# EAGLE board SONAR-6UP-PA1 (EAGLE 9.4.2)
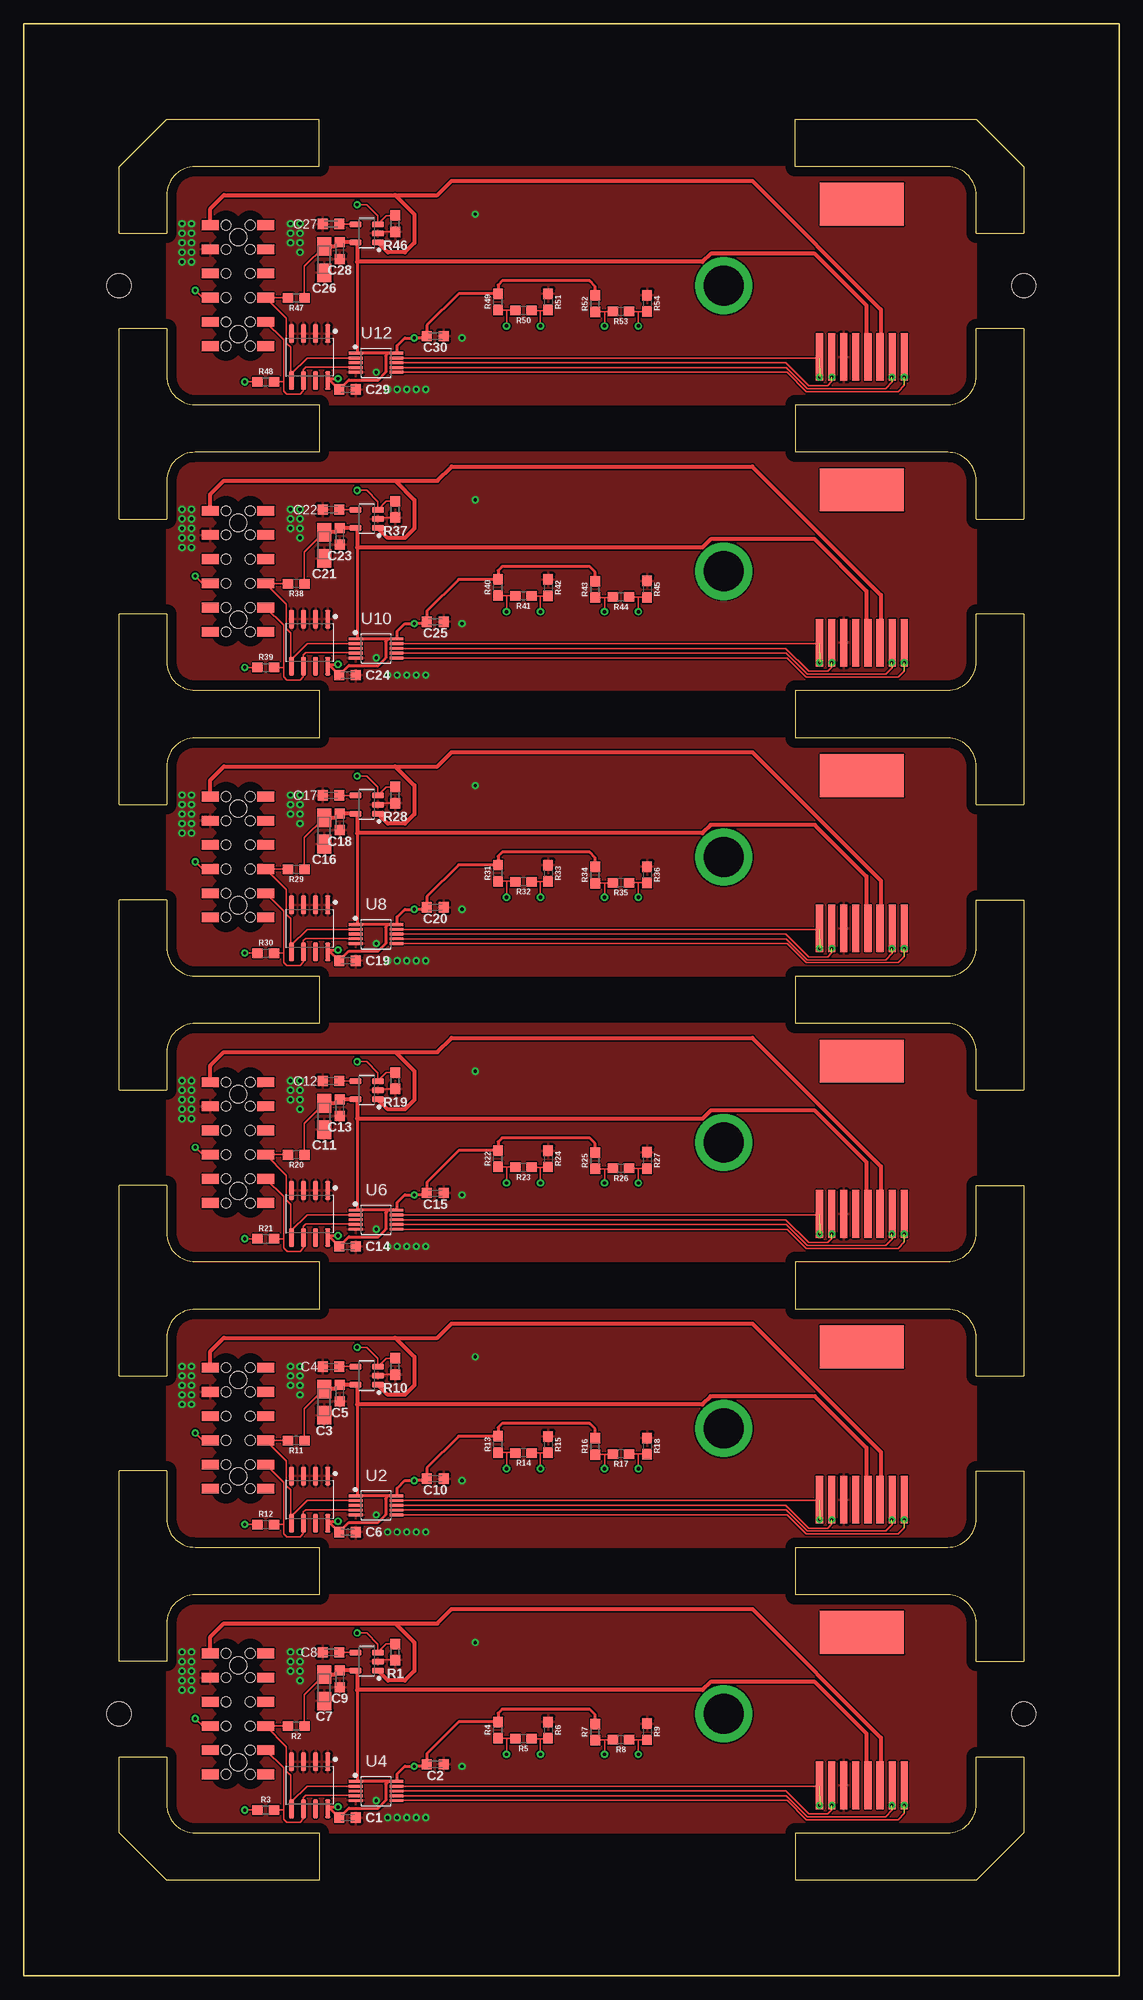
[diagram p0: board, top side]
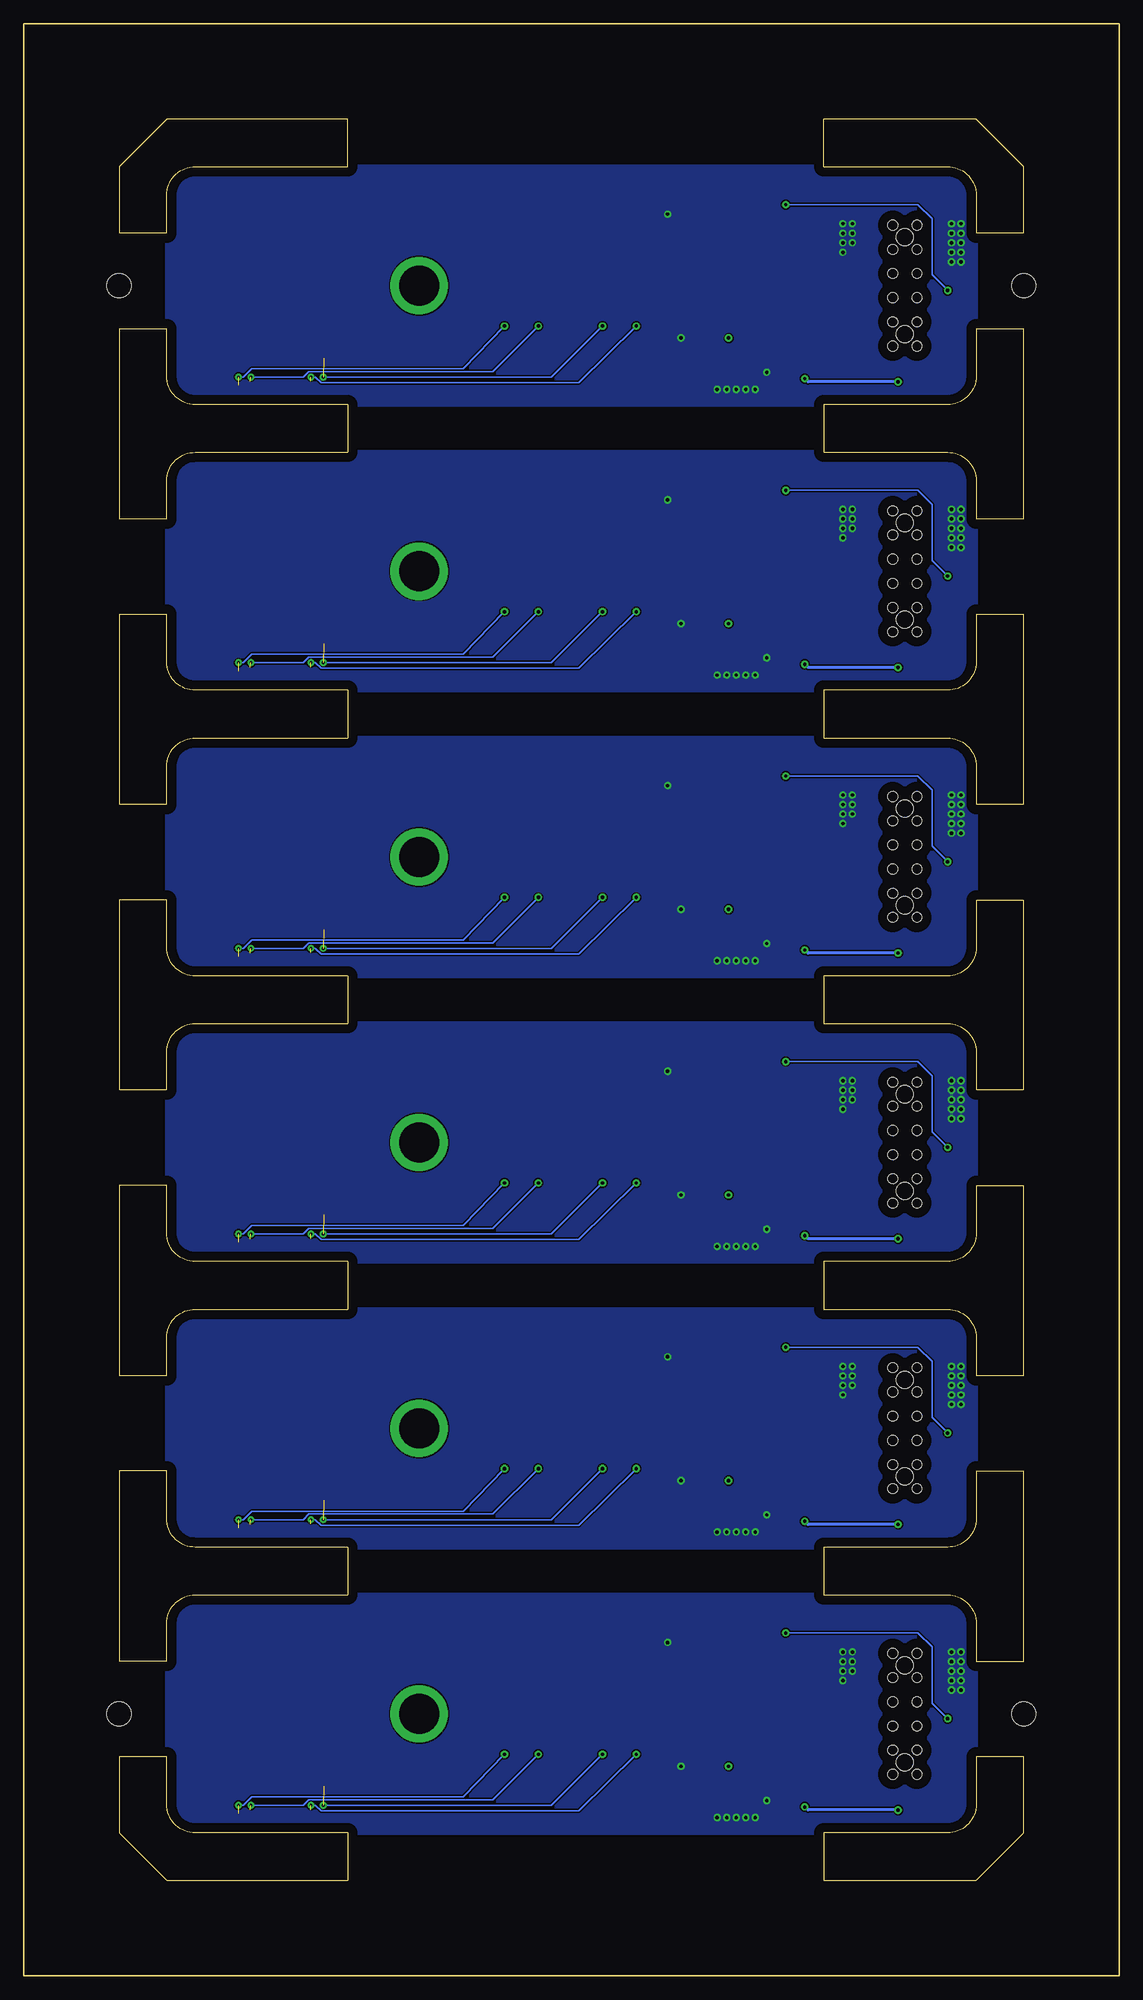
[diagram p1: board, bottom side, seen from below]

Size 115 x 205 mm. Coordinates in mm from the lower left corner, seen from the top.
Outline: 81,10 100,10 105,15 105,23 100,23 100,18 arc-90 97,15 81,15 81,10
Outline: 81,10 81,10
Outline: 15,18 arc90 18,15 31,15 31,10 15,10 10,15 10,23 15,23 15,18
Outline: 100,37 arc90 97,40 81,40 81,45 97,45 arc90 100,48 100,53 105,53 105,33 100,33 100,37
Outline: 18,40 arc90 15,37 15,33 10,33 10,53 15,53 15,48 arc90 18,45 31,45 31,40 18,40
Outline: 100,67 arc90 97,70 81,70 81,75 97,75 arc90 100,78 100,83 105,83 105,63 100,63 100,67
Outline: 18,70 arc90 15,67 15,63 10,63 10,83 15,83 15,78 arc90 18,75 31,75 31,70 18,70
Outline: 100,97 arc90 97,100 81,100 81,105 97,105 arc90 100,108 100,113 105,113 105,93 100,93 100,97
Outline: 18,100 arc90 15,97 15,93 10,93 10,113 15,113 15,108 arc90 18,105 31,105 31,100 18,100
Outline: 100,127 arc90 97,130 81,130 81,135 97,135 arc90 100,138 100,143 105,143 105,123 100,123 100,127
Outline: 18,130 arc90 15,127 15,123 10,123 10,143 15,143 15,138 arc90 18,135 31,135 31,130 18,130
Outline: 100,157 arc90 97,160 81,160 81,165 97,165 arc90 100,168 100,173 105,173 105,153 100,153 100,157
Outline: 18,160 arc90 15,157 15,153 10,153 10,173 15,173 15,168 arc90 18,165 31,165 31,160 18,160
Outline: 100,187 arc90 97,190 81,190 81,195 100,195 105,190 105,183 100,183 100,187
Outline: 18,190 arc90 15,187 15,183 10,183 10,190 15,195 31,195 31,190 18,190
Outline: 0,0 115,0 115,205 0,205 0,0
Copper layers (1*16): Top 0.035mm / dielectric 1.5mm / Bottom 0.035mm
Design rules "default *": minimum track width 6mil, minimum drill 0.35mm, track to track 6mil, track to pad 6mil, pad to pad 6mil, via to via 6mil, smd to smd 6mil, copper to edge 40mil, drill to drill 6mil, minimum pad ring 10mil, minimum via ring 8mil, stop-mask expansion 4mil, vias tented up to drill 0.35mm, thermal gap 10mil
Holes 2.54 mm at 10,177.5 105,177.5 10,27.5 105,27.5

## Footprints (pad centres in the part's own frame; a part is rotated, then mirrored left to right if it is on the bottom)
C0603K = smd 1.05 x 1.08: 1 -0.875,0; 2 0.875,0
A/3216-18R = smd 1.95 x 1.5: + 1.375,0; - -1.375,0
M20-7810645 = smd 1.02 x 1.78: P$1 -6.35,-2.91; P$2 -3.81,-2.91; P$3 -1.27,-2.91; P$4 1.27,-2.91; P$5 3.81,-2.91; P$6 6.35,-2.91; P$7 6.35,2.91; P$8 3.81,2.91; P$9 1.27,2.91; P$10 -1.27,2.91; P$11 -3.81,2.91; P$12 -6.35,2.91 | hole 1.02: -6.35,1.27; -3.81,1.27; -1.27,1.27; 1.27,1.27; 3.81,1.27; 6.35,1.27; 6.35,-1.27; 3.81,-1.27; 1.27,-1.27; -1.27,-1.27; -3.81,-1.27; -6.35,-1.27 | hole 1.8: -5.08,0; 5.08,0
85513-5009 = smd 0.76 x 5: 1 4.445,0; 2 3.175,0; 3 1.905,0; 4 0.635,0; 5 -0.635,0; 6 -1.905,0; 7 -3.175,0; 8 -4.445,0 | smd 8.8 x 4.5: P$1 0,16.05
0603 = smd 1.1 x 1: 1 -0.85,0; 2 0.85,0
SOIC127P600X175-8 = smd 1.968 x 0.569: 1 -2.473,1.905; 2 -2.473,0.635; 3 -2.473,-0.635; 4 -2.473,-1.905; 5 2.473,-1.905; 6 2.473,-0.635; 7 2.473,0.635; 8 2.473,1.905
SOP50P490X110-10 = smd 1.438 x 0.297: 1 -2.145,1; 2 -2.145,0.5; 3 -2.145,0; 4 -2.145,-0.5; 5 -2.145,-1; 6 2.145,-1; 7 2.145,-0.5; 8 2.145,0; 9 2.145,0.5; 10 2.145,1
SOT95P280X145-5 = smd 1.262 x 0.609: 1 -1.175,0.95; 2 -1.175,0; 3 -1.175,-0.95; 4 1.175,-0.95; 5 1.175,0.95

## Placement (x,y rotation side)
C1  .1uf  [C0603K]  34,16.6 0 top
C2  .1uf  [C0603K]  43.2,22.2 0 top
C3  6.8uf  [A/3216-18R]  31.54,60.23 90 top
C4  [C0603K]  32.25,63.97 180 top
C5  .1uf  [C0603K]  33.17,61.17 270 top
C6  .1uf  [C0603K]  34,46.6 0 top
C7  6.8uf  [A/3216-18R]  31.54,30.23 90 top
C8  [C0603K]  32.25,33.97 180 top
C9  .1uf  [C0603K]  33.17,31.18 270 top
C10  .1uf  [C0603K]  43.2,52.2 0 top
C11  6.8uf  [A/3216-18R]  31.54,90.23 90 top
C12  [C0603K]  32.25,93.97 180 top
C13  .1uf  [C0603K]  33.17,91.17 270 top
C14  .1uf  [C0603K]  34,76.6 0 top
C15  .1uf  [C0603K]  43.2,82.2 0 top
C16  6.8uf  [A/3216-18R]  31.54,120.23 90 top
C17  [C0603K]  32.25,123.97 180 top
C18  .1uf  [C0603K]  33.17,121.17 270 top
C19  .1uf  [C0603K]  34,106.6 0 top
C20  .1uf  [C0603K]  43.2,112.2 0 top
C21  6.8uf  [A/3216-18R]  31.54,150.23 90 top
C22  [C0603K]  32.25,153.97 180 top
C23  .1uf  [C0603K]  33.17,151.18 270 top
C24  .1uf  [C0603K]  34,136.6 0 top
C25  .1uf  [C0603K]  43.2,142.2 0 top
C26  6.8uf  [A/3216-18R]  31.54,180.23 90 top
C27  [C0603K]  32.25,183.97 180 top
C28  .1uf  [C0603K]  33.17,181.18 270 top
C29  .1uf  [C0603K]  34,166.6 0 top
C30  .1uf  [C0603K]  43.2,172.2 0 top
J1  2X6-HEADERS  [M20-7810645]  22.5,27.5 90 top
J2  95501-6889VERT  [85513-5009]  88,20 0 top
J3  2X6-HEADERS  [M20-7810645]  22.5,57.5 90 top
J4  95501-6889VERT  [85513-5009]  88,50 0 top
J5  2X6-HEADERS  [M20-7810645]  22.5,87.5 90 top
J6  95501-6889VERT  [85513-5009]  88,80 0 top
J7  2X6-HEADERS  [M20-7810645]  22.5,117.5 90 top
J8  95501-6889VERT  [85513-5009]  88,110 0 top
J9  2X6-HEADERS  [M20-7810645]  22.5,147.5 90 top
J10  95501-6889VERT  [85513-5009]  88,140 0 top
J11  2X6-HEADERS  [M20-7810645]  22.5,177.5 90 top
J12  95501-6889VERT  [85513-5009]  88,170 0 top
R1  100k  [0603]  39,34 90 top
R2  4.7k  [0603]  28.6,26.2 180 top
R3  4.7k  [0603]  25.4,17.4 0 top
R4  330  [0603]  49.8,25.8 90 top
R5  100  [0603]  52.46,24.89 180 top
R6  300  [0603]  55.06,25.79 270 top
R7  330  [0603]  60,25.6 90 top
R8  100  [0603]  62.69,24.79 180 top
R9  300  [0603]  65.45,25.62 270 top
R10  100k  [0603]  39,64 90 top
R11  4.7k  [0603]  28.6,56.2 180 top
R12  4.7k  [0603]  25.4,47.4 0 top
R13  330  [0603]  49.8,55.8 90 top
R14  100  [0603]  52.46,54.9 180 top
R15  300  [0603]  55.06,55.79 270 top
R16  330  [0603]  60,55.6 90 top
R17  100  [0603]  62.69,54.79 180 top
R18  300  [0603]  65.45,55.62 270 top
R19  100k  [0603]  39,94 90 top
R20  4.7k  [0603]  28.6,86.2 180 top
R21  4.7k  [0603]  25.4,77.4 0 top
R22  330  [0603]  49.8,85.8 90 top
R23  100  [0603]  52.46,84.89 180 top
R24  300  [0603]  55.06,85.79 270 top
R25  330  [0603]  60,85.6 90 top
R26  100  [0603]  62.69,84.79 180 top
R27  300  [0603]  65.45,85.62 270 top
R28  100k  [0603]  39,124 90 top
R29  4.7k  [0603]  28.6,116.2 180 top
R30  4.7k  [0603]  25.4,107.4 0 top
R31  330  [0603]  49.8,115.8 90 top
R32  100  [0603]  52.46,114.89 180 top
R33  300  [0603]  55.06,115.79 270 top
R34  330  [0603]  60,115.6 90 top
R35  100  [0603]  62.69,114.79 180 top
R36  300  [0603]  65.45,115.62 270 top
R37  100k  [0603]  39,154 90 top
R38  4.7k  [0603]  28.6,146.2 180 top
R39  4.7k  [0603]  25.4,137.4 0 top
R40  330  [0603]  49.8,145.8 90 top
R41  100  [0603]  52.46,144.9 180 top
R42  300  [0603]  55.06,145.79 270 top
R43  330  [0603]  60,145.6 90 top
R44  100  [0603]  62.69,144.79 180 top
R45  300  [0603]  65.45,145.62 270 top
R46  100k  [0603]  39,184 90 top
R47  4.7k  [0603]  28.6,176.2 180 top
R48  4.7k  [0603]  25.4,167.4 0 top
R49  330  [0603]  49.8,175.8 90 top
R50  100  [0603]  52.46,174.9 180 top
R51  300  [0603]  55.06,175.79 270 top
R52  330  [0603]  60,175.6 90 top
R53  100  [0603]  62.69,174.79 180 top
R54  300  [0603]  65.45,175.62 270 top
U1  M24C02-WMN6TP  [SOIC127P600X175-8]  30,50 270 top
U2  PCA9615  [SOP50P490X110-10]  37,49.4 0 top
U3  M24C02-WMN6TP  [SOIC127P600X175-8]  30,20 270 top
U4  PCA9615  [SOP50P490X110-10]  37,19.4 0 top
U5  M24C02-WMN6TP  [SOIC127P600X175-8]  30,80 270 top
U6  PCA9615  [SOP50P490X110-10]  37,79.4 0 top
U7  M24C02-WMN6TP  [SOIC127P600X175-8]  30,110 270 top
U8  PCA9615  [SOP50P490X110-10]  37,109.4 0 top
U9  M24C02-WMN6TP  [SOIC127P600X175-8]  30,140 270 top
U10  PCA9615  [SOP50P490X110-10]  37,139.4 0 top
U11  M24C02-WMN6TP  [SOIC127P600X175-8]  30,170 270 top
U12  PCA9615  [SOP50P490X110-10]  37,169.4 0 top
U$1  MIC5219-3.3YM5-TR  [SOT95P280X145-5]  36,63 180 top
U$2  MIC5219-3.3YM5-TR  [SOT95P280X145-5]  36,93 180 top
U$3  MIC5219-3.3YM5-TR  [SOT95P280X145-5]  36,123 180 top
U$4  MIC5219-3.3YM5-TR  [SOT95P280X145-5]  36,33 180 top
U$5  MIC5219-3.3YM5-TR  [SOT95P280X145-5]  36,153 180 top
U$6  MIC5219-3.3YM5-TR  [SOT95P280X145-5]  36,183 180 top

## Library data of the parts
C1-C30 = rcl; SPICEPREFIX: C
J1-J12 U1-U12 U$1-U$6 = Conservify
R1-R54 = SparkFun-Resistors; PROD_ID: RES-07828

## Nets
3V1: C3.+ C5.1 C6.1 C10.1 J4.4 R11.1 R12.1 R13.2 R16.2 U1.8 U2.1 U2.10 U$1.5
3V2: C11.+ C13.1 C14.1 C15.1 J6.4 R20.1 R21.1 R22.2 R25.2 U5.8 U6.1 U6.10 U$2.5
3V3: C1.1 C2.1 C7.+ C9.1 J2.4 R2.1 R3.1 R4.2 R7.2 U3.8 U4.1 U4.10 U$4.5
3V4: C16.+ C18.1 C19.1 C20.1 J8.4 R29.1 R30.1 R31.2 R34.2 U7.8 U8.1 U8.10 U$3.5
3V5: C21.+ C23.1 C24.1 C25.1 J10.4 R38.1 R39.1 R40.2 R43.2 U9.8 U10.1 U10.10 U$5.5
3V6: C26.+ C28.1 C29.1 C30.1 J12.4 R47.1 R48.1 R49.2 R52.2 U11.8 U12.1 U12.10 U$6.5
EN: U4.3
EN1: U2.3
EN2: U6.3
EN3: U8.3
EN4: U10.3
EN5: U12.3
ENABLE: J1.P$10 R1.2 U$4.3
ENABLE1: J3.P$10 R10.2 U$1.3
ENABLE2: J5.P$10 R19.2 U$2.3
ENABLE3: J7.P$10 R28.2 U$3.3
ENABLE4: J9.P$10 R37.2 U$5.3
ENABLE5: J11.P$10 R46.2 U$6.3
G1: J1.P$11
G2: J1.P$12
G3: J3.P$11
G4: J3.P$12
G5: J5.P$11
G6: J5.P$12
G7: J7.P$11
G8: J7.P$12
G9: J9.P$11
G10: J9.P$12
G11: J11.P$11
G12: J11.P$12
GND: C1.2 C2.2 C7.- C8.2 C9.2 J1.P$8 J2.6 R1.1 R6.1 R9.1 U3.1 U3.2 U3.3 U3.4 U4.5 U$4.2
GND1: C3.- C4.2 C5.2 C6.2 C10.2 J3.P$8 J4.6 R10.1 R15.1 R18.1 U1.1 U1.2 U1.3 U1.4 U2.5 U$1.2
GND2: C11.- C12.2 C13.2 C14.2 C15.2 J5.P$8 J6.6 R19.1 R24.1 R27.1 U5.1 U5.2 U5.3 U5.4 U6.5 U$2.2
GND3: C16.- C17.2 C18.2 C19.2 C20.2 J7.P$8 J8.6 R28.1 R33.1 R36.1 U7.1 U7.2 U7.3 U7.4 U8.5 U$3.2
GND4: C21.- C22.2 C23.2 C24.2 C25.2 J9.P$8 J10.6 R37.1 R42.1 R45.1 U9.1 U9.2 U9.3 U9.4 U10.5 U$5.2
GND5: C26.- C27.2 C28.2 C29.2 C30.2 J11.P$8 J12.6 R46.1 R51.1 R54.1 U11.1 U11.2 U11.3 U11.4 U12.5 U$6.2
IN3V1: J3.P$9
IN3V2: J5.P$9
IN3V3: J1.P$9
IN3V4: J7.P$9
IN3V5: J9.P$9
IN3V6: J11.P$9
LCL-M: J2.1 R8.1 R9.2 U4.6
LCL-M1: J4.1 R17.1 R18.2 U2.6
LCL-M2: J6.1 R26.1 R27.2 U6.6
LCL-M3: J8.1 R35.1 R36.2 U8.6
LCL-M4: J10.1 R44.1 R45.2 U10.6
LCL-M5: J12.1 R53.1 R54.2 U12.6
LCL-P: J2.2 R7.1 R8.2 U4.7
LCL-P1: J4.2 R16.1 R17.2 U2.7
LCL-P2: J6.2 R25.1 R26.2 U6.7
LCL-P3: J8.2 R34.1 R35.2 U8.7
LCL-P4: J10.2 R43.1 R44.2 U10.7
LCL-P5: J12.2 R52.1 R53.2 U12.7
LDA-M: J2.8 R5.1 R6.2 U4.9
LDA-M1: J4.8 R14.1 R15.2 U2.9
LDA-M2: J6.8 R23.1 R24.2 U6.9
LDA-M3: J8.8 R32.1 R33.2 U8.9
LDA-M4: J10.8 R41.1 R42.2 U10.9
LDA-M5: J12.8 R50.1 R51.2 U12.9
LDA-P: J2.7 R4.1 R5.2 U4.8
LDA-P1: J4.7 R13.1 R14.2 U2.8
LDA-P2: J6.7 R22.1 R23.2 U6.8
LDA-P3: J8.7 R31.1 R32.2 U8.8
LDA-P4: J10.7 R40.1 R41.2 U10.8
LDA-P5: J12.7 R49.1 R50.2 U12.8
MISO: J1.P$4
MISO1: J3.P$4
MISO2: J5.P$4
MISO3: J7.P$4
MISO4: J9.P$4
MISO5: J11.P$4
MOSI: J1.P$5
MOSI1: J3.P$5
MOSI2: J5.P$5
MOSI3: J7.P$5
MOSI4: J9.P$5
MOSI5: J11.P$5
N$3: C4.1 U$1.4
N$5: C12.1 U$2.4
N$6: C8.1 U$4.4
N$8: C17.1 U$3.4
N$10: C22.1 U$5.4
N$12: C27.1 U$6.4
NC: J1.P$1
NC1: J3.P$1
NC2: J5.P$1
NC3: J7.P$1
NC4: J9.P$1
NC5: J11.P$1
SCK: J1.P$6
SCK1: J3.P$6
SCK2: J5.P$6
SCK3: J7.P$6
SCK4: J9.P$6
SCK5: J11.P$6
SCL: J1.P$2 R3.2 U3.6 U4.4
SCL1: J3.P$2 R12.2 U1.6 U2.4
SCL2: J5.P$2 R21.2 U5.6 U6.4
SCL3: J7.P$2 R30.2 U7.6 U8.4
SCL4: J9.P$2 R39.2 U9.6 U10.4
SCL5: J11.P$2 R48.2 U11.6 U12.4
SDA: J1.P$3 R2.2 U3.5 U4.2
SDA1: J3.P$3 R11.2 U1.5 U2.2
SDA2: J5.P$3 R20.2 U5.5 U6.2
SDA3: J7.P$3 R29.2 U7.5 U8.2
SDA4: J9.P$3 R38.2 U9.5 U10.2
SDA5: J11.P$3 R47.2 U11.5 U12.2
UNREG: J1.P$7 J2.3 U$4.1
UNREG1: J3.P$7 J4.3 U$1.1
UNREG2: J5.P$7 J6.3 U$2.1
UNREG3: J7.P$7 J8.3 U$3.1
UNREG4: J9.P$7 J10.3 U$5.1
UNREG5: J11.P$7 J12.3 U$6.1
WC: U3.7
WC1: U1.7
WC2: U5.7
WC3: U7.7
WC4: U9.7
WC5: U11.7

## Tracks (layer width: path | path; a pad name or v marks a point on that pad's centre or on a via)
3V1  (via drill 0.35)
  Top 0.152: C5.1 32.73,61.61 | C10.1 42.12,52 | 32,47.73 32.2,47.53 U1.8 | R11.1 29.45,59.52 C3.+ | R12.1 v23.2,47.4 | 38.27,50.4 U2.10 39.2,50.45 | 35,50.4 U2.1 | U$1.5 35,61.88
  Top 0.305: 32,47.73 v33,47.73 | 42.12,52 v41,52 40,52 39.2,51.2 39.2,50.45 | 32.2,47.53 C6.1 34.12,47.6 37.2,47.6 38,48.4 38,50.13 38.27,50.4 | R16.2 60,57.4 59.4,58 50.23,58 49.8,57.58 R13.2 45.65,56.65 42.33,53.33 C10.1 | U2.10 35,50.4 35,60
  Top 0.406: U$1.5 C5.1 | 32.73,61.61 C3.+ | 35,61.88 35,60 71.25,60 72.11,60.86 83.07,60.86 88.48,55.44 88.48,51.55 88.64,51.4 J4.4
  Bottom 0.305: v23.2,47.4 32.67,47.4 v33,47.73
3V2  (via drill 0.35)
  Top 0.152: C13.1 32.73,91.61 | C15.1 42.12,82 | 32,77.73 32.2,77.53 U5.8 | R20.1 29.45,89.52 C11.+ | R21.1 v23.2,77.4 | 38.27,80.4 U6.10 39.2,80.45 | 35,80.4 U6.1 | U$2.5 35,91.88
  Top 0.305: 32,77.73 v33,77.73 | 42.12,82 v41,82 40,82 39.2,81.2 39.2,80.45 | 32.2,77.53 C14.1 34.12,77.6 37.2,77.6 38,78.4 38,80.13 38.27,80.4 | R25.2 60,87.4 59.4,88 50.23,88 49.8,87.58 R22.2 45.65,86.65 42.33,83.33 C15.1 | U6.10 35,80.4 35,90
  Top 0.406: U$2.5 C13.1 | 32.73,91.61 C11.+ | 35,91.88 35,90 71.25,90 72.11,90.86 83.07,90.86 88.48,85.44 88.48,81.55 88.64,81.4 J6.4
  Bottom 0.305: v23.2,77.4 32.67,77.4 v33,77.73
3V3  (via drill 0.35)
  Top 0.152: C9.1 32.73,31.61 | C2.1 42.12,22 | 32,17.73 32.2,17.53 U3.8 | R2.1 29.45,29.52 C7.+ | R3.1 v23.2,17.4 | 38.27,20.4 U4.10 39.2,20.45 | 35,20.4 U4.1 | U$4.5 35,31.88
  Top 0.305: 32,17.73 v33,17.73 | 42.12,22 v41,22 40,22 39.2,21.2 39.2,20.45 | 32.2,17.53 C1.1 34.12,17.6 37.2,17.6 38,18.4 38,20.13 38.27,20.4 | R7.2 60,27.4 59.4,28 50.23,28 49.8,27.57 R4.2 45.65,26.65 42.33,23.32 C2.1 | U4.10 35,20.4 35,30
  Top 0.406: U$4.5 C9.1 | 32.73,31.61 C7.+ | 35,31.88 35,30 71.25,30 72.11,30.86 83.07,30.86 88.48,25.44 88.48,21.55 88.64,21.4 J2.4
  Bottom 0.305: v23.2,17.4 32.67,17.4 v33,17.73
3V4  (via drill 0.35)
  Top 0.152: C18.1 32.73,121.61 | C20.1 42.12,112 | 32,107.73 32.2,107.53 U7.8 | R29.1 29.45,119.52 C16.+ | R30.1 v23.2,107.4 | 38.27,110.4 U8.10 39.2,110.45 | 35,110.4 U8.1 | U$3.5 35,121.88
  Top 0.305: 32,107.73 v33,107.73 | 42.12,112 v41,112 40,112 39.2,111.2 39.2,110.45 | 32.2,107.53 C19.1 34.12,107.6 37.2,107.6 38,108.4 38,110.13 38.27,110.4 | R34.2 60,117.4 59.4,118 50.23,118 49.8,117.58 R31.2 45.65,116.65 42.33,113.33 C20.1 | U8.10 35,110.4 35,120
  Top 0.406: U$3.5 C18.1 | 32.73,121.61 C16.+ | 35,121.88 35,120 71.25,120 72.11,120.86 83.07,120.86 88.48,115.44 88.48,111.55 88.64,111.4 J8.4
  Bottom 0.305: v23.2,107.4 32.67,107.4 v33,107.73
3V5  (via drill 0.35)
  Top 0.152: C23.1 32.73,151.61 | C25.1 42.12,142 | 32,137.73 32.2,137.53 U9.8 | R38.1 29.45,149.52 C21.+ | R39.1 v23.2,137.4 | 38.27,140.4 U10.10 39.2,140.46 | 35,140.4 U10.1 | U$5.5 35,151.88
  Top 0.305: 32,137.73 v33,137.73 | 42.12,142 v41,142 40,142 39.2,141.2 39.2,140.46 | 32.2,137.53 C24.1 34.12,137.6 37.2,137.6 38,138.4 38,140.13 38.27,140.4 | R43.2 60,147.4 59.4,148 50.23,148 49.8,147.57 R40.2 45.65,146.65 42.33,143.32 C25.1 | U10.10 35,140.4 35,150
  Top 0.406: U$5.5 C23.1 | 32.73,151.61 C21.+ | 35,151.88 35,150 71.25,150 72.11,150.86 83.07,150.86 88.48,145.44 88.48,141.55 88.64,141.4 J10.4
  Bottom 0.305: v23.2,137.4 32.67,137.4 v33,137.73
3V6  (via drill 0.35)
  Top 0.152: C28.1 32.73,181.61 | C30.1 42.12,172 | 32,167.73 32.2,167.53 U11.8 | R47.1 29.45,179.52 C26.+ | R48.1 v23.2,167.4 | 38.27,170.4 U12.10 39.2,170.46 | 35,170.4 U12.1 | U$6.5 35,181.88
  Top 0.305: 32,167.73 v33,167.73 | 42.12,172 v41,172 40,172 39.2,171.2 39.2,170.46 | 32.2,167.53 C29.1 34.12,167.6 37.2,167.6 38,168.4 38,170.13 38.27,170.4 | R52.2 60,177.4 59.4,178 50.23,178 49.8,177.57 R49.2 45.65,176.65 42.33,173.32 C30.1 | U12.10 35,170.4 35,180
  Top 0.406: U$6.5 C28.1 | 32.73,181.61 C26.+ | 35,181.88 35,180 71.25,180 72.11,180.86 83.07,180.86 88.48,175.44 88.48,171.55 88.64,171.4 J12.4
  Bottom 0.305: v23.2,167.4 32.67,167.4 v33,167.73
ENABLE  (via drill 0.35)
  Top 0.152: R1.2 38.08,34.85 U$4.3 37.17,34.83 36,36 v35,36 | J1.P$10 18.77,26.23 v18,27
  Bottom 0.152: v18,27 19.63,28.63 19.63,34.51 21.11,36 v35,36
ENABLE1  (via drill 0.35)
  Top 0.152: R10.2 38.08,64.85 U$1.3 37.17,64.83 36,66 v35,66 | J3.P$10 18.77,56.23 v18,57
  Bottom 0.152: v18,57 19.63,58.63 19.63,64.51 21.11,66 v35,66
ENABLE2  (via drill 0.35)
  Top 0.152: R19.2 38.08,94.85 U$2.3 37.17,94.83 36,96 v35,96 | J5.P$10 18.77,86.23 v18,87
  Bottom 0.152: v18,87 19.63,88.63 19.63,94.51 21.11,96 v35,96
ENABLE3  (via drill 0.35)
  Top 0.152: R28.2 38.08,124.85 U$3.3 37.17,124.83 36,126 v35,126 | J7.P$10 18.77,116.23 v18,117
  Bottom 0.152: v18,117 19.63,118.63 19.63,124.51 21.11,126 v35,126
ENABLE4  (via drill 0.35)
  Top 0.152: R37.2 38.08,154.85 U$5.3 37.17,154.82 36,156 v35,156 | J9.P$10 18.77,146.23 v18,147
  Bottom 0.152: v18,147 19.63,148.63 19.63,154.51 21.11,156 v35,156
ENABLE5  (via drill 0.35)
  Top 0.152: R46.2 38.08,184.85 U$6.3 37.17,184.82 36,186 v35,186 | J11.P$10 18.77,176.23 v18,177
  Bottom 0.152: v18,177 19.63,178.63 19.63,184.51 21.11,186 v35,186
GND  (via drill 0.35)
  Top 0.152: U$4.2 37.33,33.15 R1.1
  other vias: 28,34 29,34 29,33 28,33 29,32 28,32 29,31 16.6,34 16.6,33 16.6,32 16.6,31 16.6,30 17.6,34 17.6,33 17.6,32 17.6,31 17.6,30 37,18.4 47.4,35 42.2,16.6 38.2,16.6 39.2,16.6 40.2,16.6 41.2,16.6 46,22
  pour Top: 15,40 100,40 100,15 15,15
  pour Bottom: 15,40 100,40 100,15 15,15
GND1  (via drill 0.35)
  Top 0.152: U$1.2 37.33,63.15 R10.1
  other vias: 28,64 29,64 29,63 28,63 29,62 28,62 29,61 16.6,64 16.6,63 16.6,62 16.6,61 16.6,60 17.6,64 17.6,63 17.6,62 17.6,61 17.6,60 37,48.4 47.4,65 42.2,46.6 38.2,46.6 39.2,46.6 40.2,46.6 41.2,46.6 46,52
  pour Top: 15,70 100,70 100,45 15,45
  pour Bottom: 15,70 100,70 100,45 15,45
GND2  (via drill 0.35)
  Top 0.152: U$2.2 37.33,93.15 R19.1
  other vias: 28,94 29,94 29,93 28,93 29,92 28,92 29,91 16.6,94 16.6,93 16.6,92 16.6,91 16.6,90 17.6,94 17.6,93 17.6,92 17.6,91 17.6,90 37,78.4 47.4,95 42.2,76.6 38.2,76.6 39.2,76.6 40.2,76.6 41.2,76.6 46,82
  pour Top: 15,100 100,100 100,75 15,75
  pour Bottom: 15,100 100,100 100,75 15,75
GND3  (via drill 0.35)
  Top 0.152: U$3.2 37.33,123.15 R28.1
  other vias: 28,124 29,124 29,123 28,123 29,122 28,122 29,121 16.6,124 16.6,123 16.6,122 16.6,121 16.6,120 17.6,124 17.6,123 17.6,122 17.6,121 17.6,120 37,108.4 47.4,125 42.2,106.6 38.2,106.6 39.2,106.6 40.2,106.6 41.2,106.6 46,112
  pour Top: 15,130 100,130 100,105 15,105
  pour Bottom: 15,130 100,130 100,105 15,105
GND4  (via drill 0.35)
  Top 0.152: U$5.2 37.33,153.15 R37.1
  other vias: 28,154 29,154 29,153 28,153 29,152 28,152 29,151 16.6,154 16.6,153 16.6,152 16.6,151 16.6,150 17.6,154 17.6,153 17.6,152 17.6,151 17.6,150 37,138.4 47.4,155 42.2,136.6 38.2,136.6 39.2,136.6 40.2,136.6 41.2,136.6 46,142
  pour Top: 15,160 100,160 100,135 15,135
  pour Bottom: 15,160 100,160 100,135 15,135
GND5  (via drill 0.35)
  Top 0.152: U$6.2 37.33,183.15 R46.1
  other vias: 28,184 29,184 29,183 28,183 29,182 28,182 29,181 16.6,184 16.6,183 16.6,182 16.6,181 16.6,180 17.6,184 17.6,183 17.6,182 17.6,181 17.6,180 37,168.4 47.4,185 42.2,166.6 38.2,166.6 39.2,166.6 40.2,166.6 41.2,166.6 46,172
  pour Top: 15,190 100,190 100,165 15,165
  pour Bottom: 15,190 100,190 100,165 15,165
LCL-M  (via drill 0.3, 0.35)  (1 unrouted)
  Top 0.152: U4.6 80.14,18.4 82.15,16.39 91.79,16.39 92.44,17.05 J2.1 | R8.1 64.53,24.79 | 64.53,24.79 65.43,24.79 R9.2 | v64.53,23.25 64.53,24.79
  Bottom 0.152: v64.53,23.25 68.87,18.79 91.09,18.79 91.97,17.9 v92.45,17.9
LCL-M1  (via drill 0.3, 0.35)  (1 unrouted)
  Top 0.152: U2.6 80.14,48.4 82.15,46.39 91.79,46.39 92.44,47.05 J4.1 | R17.1 64.53,54.79 | 64.53,54.79 65.43,54.79 R18.2 | v64.53,53.26 64.53,54.79
  Bottom 0.152: v64.53,53.26 68.87,48.79 91.09,48.79 91.97,47.9 v92.45,47.9
LCL-M2  (via drill 0.3, 0.35)  (1 unrouted)
  Top 0.152: U6.6 80.14,78.4 82.15,76.39 91.79,76.39 92.44,77.05 J6.1 | R26.1 64.53,84.79 | 64.53,84.79 65.43,84.79 R27.2 | v64.53,83.25 64.53,84.79
  Bottom 0.152: v64.53,83.25 68.87,78.79 91.09,78.79 91.97,77.9 v92.45,77.9
LCL-M3  (via drill 0.3, 0.35)  (1 unrouted)
  Top 0.152: U8.6 80.14,108.4 82.15,106.39 91.79,106.39 92.44,107.05 J8.1 | R35.1 64.53,114.79 | 64.53,114.79 65.43,114.79 R36.2 | v64.53,113.25 64.53,114.79
  Bottom 0.152: v64.53,113.25 68.87,108.79 91.09,108.79 91.97,107.9 v92.45,107.9
LCL-M4  (via drill 0.3, 0.35)  (1 unrouted)
  Top 0.152: U10.6 80.14,138.4 82.15,136.39 91.79,136.39 92.44,137.04 J10.1 | R44.1 64.53,144.79 | 64.53,144.79 65.43,144.79 R45.2 | v64.53,143.25 64.53,144.79
  Bottom 0.152: v64.53,143.25 68.87,138.79 91.09,138.79 91.97,137.9 v92.45,137.9
LCL-M5  (via drill 0.3, 0.35)  (1 unrouted)
  Top 0.152: U12.6 80.14,168.4 82.15,166.39 91.79,166.39 92.44,167.04 J12.1 | R53.1 64.53,174.79 | 64.53,174.79 65.43,174.79 R54.2 | v64.53,173.25 64.53,174.79
  Bottom 0.152: v64.53,173.25 68.87,168.79 91.09,168.79 91.97,167.9 v92.45,167.9
LCL-P  (via drill 0.3, 0.35)  (1 unrouted)
  Top 0.152: U4.7 80.07,18.9 82.27,16.7 90.5,16.7 91.2,17.4 91.2,19.98 J2.2 | R7.1 61,24.75 | 61,24.75 61.8,24.75 R8.2 | v60.97,23.25 60.97,24.72 61,24.75
  Bottom 0.152: v91.15,17.9 85.67,17.9 85.09,18.48 65.75,18.48 v60.97,23.25
LCL-P1  (via drill 0.3, 0.35)  (1 unrouted)
  Top 0.152: U2.7 80.07,48.9 82.27,46.7 90.5,46.7 91.2,47.4 91.2,49.98 J4.2 | R16.1 61,54.75 | 61,54.75 61.8,54.75 R17.2 | v60.97,53.26 60.97,54.72 61,54.75
  Bottom 0.152: v91.15,47.9 85.67,47.9 85.09,48.48 65.75,48.48 v60.97,53.26
LCL-P2  (via drill 0.3, 0.35)  (1 unrouted)
  Top 0.152: U6.7 80.07,78.9 82.27,76.69 90.5,76.69 91.2,77.4 91.2,79.97 J6.2 | R25.1 61,84.75 | 61,84.75 61.8,84.75 R26.2 | v60.97,83.25 60.97,84.72 61,84.75
  Bottom 0.152: v91.15,77.9 85.67,77.9 85.09,78.48 65.75,78.48 v60.97,83.25
LCL-P3  (via drill 0.3, 0.35)  (1 unrouted)
  Top 0.152: U8.7 80.07,108.9 82.27,106.69 90.5,106.69 91.2,107.4 91.2,109.97 J8.2 | R34.1 61,114.75 | 61,114.75 61.8,114.75 R35.2 | v60.97,113.25 60.97,114.72 61,114.75
  Bottom 0.152: v91.15,107.9 85.67,107.9 85.09,108.48 65.75,108.48 v60.97,113.25
LCL-P4  (via drill 0.3, 0.35)  (1 unrouted)
  Top 0.152: U10.7 80.07,138.9 82.27,136.69 90.5,136.69 91.2,137.4 91.2,139.97 J10.2 | R43.1 61,144.75 | 61,144.75 61.8,144.75 R44.2 | v60.97,143.25 60.97,144.72 61,144.75
  Bottom 0.152: v91.15,137.9 85.67,137.9 85.09,138.48 65.75,138.48 v60.97,143.25
LCL-P5  (via drill 0.3, 0.35)  (1 unrouted)
  Top 0.152: U12.7 80.07,168.9 82.27,166.69 90.5,166.69 91.2,167.4 91.2,169.97 J12.2 | R52.1 61,174.75 | 61,174.75 61.8,174.75 R53.2 | v60.97,173.25 60.97,174.72 61,174.75
  Bottom 0.152: v91.15,167.9 85.67,167.9 85.09,168.48 65.75,168.48 v60.97,173.25
LDA-M  (via drill 0.3, 0.35)  (1 unrouted)
  Top 0.152: J2.8 83.58,19.98 83.5,19.9 U4.9 | R5.1 54.24,24.89 | 54.24,24.89 55.02,24.89 R6.2 | v54.24,23.25 54.24,24.89
  Bottom 0.152: v83.55,17.9 59.6,17.9 v54.24,23.25
LDA-M1  (via drill 0.3, 0.35)  (1 unrouted)
  Top 0.152: J4.8 83.58,49.98 83.5,49.9 U2.9 | R14.1 54.24,54.9 | 54.24,54.9 55.02,54.9 R15.2 | v54.24,53.26 54.24,54.9
  Bottom 0.152: v83.55,47.9 59.6,47.9 v54.24,53.26
LDA-M2  (via drill 0.3, 0.35)  (1 unrouted)
  Top 0.152: J6.8 83.58,79.97 83.5,79.9 U6.9 | R23.1 54.24,84.89 | 54.24,84.89 55.02,84.89 R24.2 | v54.24,83.25 54.24,84.89
  Bottom 0.152: v83.55,77.9 59.6,77.9 v54.24,83.25
LDA-M3  (via drill 0.3, 0.35)  (1 unrouted)
  Top 0.152: J8.8 83.58,109.97 83.5,109.9 U8.9 | R32.1 54.24,114.89 | 54.24,114.89 55.02,114.89 R33.2 | v54.24,113.25 54.24,114.89
  Bottom 0.152: v83.55,107.9 59.6,107.9 v54.24,113.25
LDA-M4  (via drill 0.3, 0.35)  (1 unrouted)
  Top 0.152: J10.8 83.58,139.97 83.5,139.9 U10.9 | R41.1 54.24,144.9 | 54.24,144.9 55.02,144.9 R42.2 | v54.24,143.25 54.24,144.9
  Bottom 0.152: v83.55,137.9 59.6,137.9 v54.24,143.25
LDA-M5  (via drill 0.3, 0.35)  (1 unrouted)
  Top 0.152: J12.8 83.58,169.97 83.5,169.9 U12.9 | R50.1 54.24,174.9 | 54.24,174.9 55.02,174.9 R51.2 | v54.24,173.25 54.24,174.9
  Bottom 0.152: v83.55,167.9 59.6,167.9 v54.24,173.25
LDA-P  (via drill 0.3, 0.35)  (1 unrouted)
  Top 0.152: J2.7 84.85,19.98 84.85,17.45 84.4,17 82.4,17 80,19.4 U4.8 | R4.1 50.69,24.95 | 50.69,24.95 51.55,24.95 R5.2 | v50.69,23.25 50.69,24.95
  Bottom 0.152: v84.85,17.9 84.37,17.9 83.79,17.32 56.75,17.32 v50.69,23.25
LDA-P1  (via drill 0.3, 0.35)  (1 unrouted)
  Top 0.152: J4.7 84.85,49.98 84.85,47.45 84.4,47 82.4,47 80,49.4 U2.8 | R13.1 50.69,54.95 | 50.69,54.95 51.55,54.95 R14.2 | v50.69,53.26 50.69,54.95
  Bottom 0.152: v84.85,47.9 84.37,47.9 83.79,47.32 56.75,47.32 v50.69,53.26
LDA-P2  (via drill 0.3, 0.35)  (1 unrouted)
  Top 0.152: J6.7 84.85,79.97 84.85,77.45 84.4,77 82.4,77 80,79.4 U6.8 | R22.1 50.69,84.95 | 50.69,84.95 51.55,84.95 R23.2 | v50.69,83.25 50.69,84.95
  Bottom 0.152: v84.85,77.9 84.37,77.9 83.79,77.32 56.75,77.32 v50.69,83.25
LDA-P3  (via drill 0.3, 0.35)  (1 unrouted)
  Top 0.152: J8.7 84.85,109.97 84.85,107.45 84.4,107 82.4,107 80,109.4 U8.8 | R31.1 50.69,114.95 | 50.69,114.95 51.55,114.95 R32.2 | v50.69,113.25 50.69,114.95
  Bottom 0.152: v84.85,107.9 84.37,107.9 83.79,107.32 56.75,107.32 v50.69,113.25
LDA-P4  (via drill 0.3, 0.35)  (1 unrouted)
  Top 0.152: J10.7 84.85,139.97 84.85,137.45 84.4,137 82.4,137 80,139.4 U10.8 | R40.1 50.69,144.95 | 50.69,144.95 51.55,144.95 R41.2 | v50.69,143.25 50.69,144.95
  Bottom 0.152: v84.85,137.9 84.37,137.9 83.79,137.32 56.75,137.32 v50.69,143.25
LDA-P5  (via drill 0.3, 0.35)  (1 unrouted)
  Top 0.152: J12.7 84.85,169.97 84.85,167.45 84.4,167 82.4,167 80,169.4 U12.8 | R49.1 50.69,174.95 | 50.69,174.95 51.55,174.95 R50.2 | v50.69,173.25 50.69,174.95
  Bottom 0.152: v84.85,167.9 84.37,167.9 83.79,167.32 56.75,167.32 v50.69,173.25
N$1  (via drill 4.2 pad 6)
  other vias: 73.5,27.5
N$2  (via drill 4.2 pad 6)
  other vias: 73.5,57.5
N$3
  Top 0.152: C4.1 34.81,63.97 U$1.4
N$4  (via drill 4.2 pad 6)
  other vias: 73.5,87.5
N$5
  Top 0.152: C12.1 34.81,93.97 U$2.4
N$6
  Top 0.152: C8.1 34.81,33.97 U$4.4
N$7  (via drill 4.2 pad 6)
  other vias: 73.5,117.5
N$8
  Top 0.152: C17.1 34.81,123.97 U$3.4
N$9  (via drill 4.2 pad 6)
  other vias: 73.5,147.5
N$10
  Top 0.152: C22.1 34.81,153.97 U$5.4
N$11  (via drill 4.2 pad 6)
  other vias: 73.5,177.5
N$12
  Top 0.152: C27.1 34.81,183.97 U$6.4
SCL
  Top 0.152: J1.P$2 27.28,21.82 27.28,17.42 | 27.28,17.42 27.28,16.42 27.6,16.1 27.6,16.09 29,16.09 29.36,16.46 U3.6 29.36,18.7 29.61,18.94 34.82,18.94 U4.4 | R3.2 27.26,17.4 27.28,17.42
SCL1
  Top 0.152: J3.P$2 27.28,51.82 27.28,47.42 | 27.28,47.42 27.28,46.42 27.6,46.1 27.6,46.09 29,46.09 29.36,46.46 U1.6 29.36,48.7 29.61,48.94 34.82,48.94 U2.4 | R12.2 27.26,47.4 27.28,47.42
SCL2
  Top 0.152: J5.P$2 27.28,81.82 27.28,77.42 | 27.28,77.42 27.28,76.42 27.6,76.1 27.6,76.09 29,76.09 29.36,76.46 U5.6 29.36,78.7 29.61,78.94 34.82,78.94 U6.4 | R21.2 27.26,77.4 27.28,77.42
SCL3
  Top 0.152: J7.P$2 27.28,111.82 27.28,107.42 | 27.28,107.42 27.28,106.42 27.6,106.1 27.6,106.09 29,106.09 29.36,106.46 U7.6 29.36,108.7 29.61,108.94 34.82,108.94 U8.4 | R30.2 27.26,107.4 27.28,107.42
SCL4
  Top 0.152: J9.P$2 27.28,141.82 27.28,137.42 | 27.28,137.42 27.28,136.42 27.6,136.1 27.6,136.09 29,136.09 29.36,136.46 U9.6 29.36,138.7 29.61,138.94 34.82,138.94 U10.4 | R39.2 27.26,137.4 27.28,137.42
SCL5
  Top 0.152: J11.P$2 27.28,171.82 27.28,167.42 | 27.28,167.42 27.28,166.42 27.6,166.1 27.6,166.09 29,166.09 29.36,166.46 U11.6 29.36,168.7 29.61,168.94 34.82,168.94 U12.4 | R48.2 27.26,167.4 27.28,167.42
SDA
  Top 0.152: R2.2 27.72,26.23 J1.P$3 27.58,24.06 27.58,21.46 28.02,21.02 28.02,17.6 U3.5 28.09,18.25 29.75,19.9 29.81,19.9 30,19.9 U4.2
SDA1
  Top 0.152: R11.2 27.72,56.23 J3.P$3 27.58,54.06 27.58,51.46 28.02,51.02 28.02,47.6 U1.5 28.09,48.25 29.75,49.9 29.81,49.9 30,49.9 U2.2
SDA2
  Top 0.152: R20.2 27.72,86.23 J5.P$3 27.58,84.06 27.58,81.46 28.02,81.02 28.02,77.6 U5.5 28.09,78.25 29.75,79.9 29.81,79.9 30,79.9 U6.2
SDA3
  Top 0.152: R29.2 27.72,116.23 J7.P$3 27.58,114.06 27.58,111.46 28.02,111.02 28.02,107.6 U7.5 28.09,108.25 29.75,109.9 29.81,109.9 30,109.9 U8.2
SDA4
  Top 0.152: R38.2 27.72,146.23 J9.P$3 27.58,144.06 27.58,141.46 28.02,141.02 28.02,137.6 U9.5 28.09,138.25 29.75,139.9 29.81,139.9 30,139.9 U10.2
SDA5
  Top 0.152: R47.2 27.72,176.23 J11.P$3 27.58,174.06 27.58,171.46 28.02,171.02 28.02,167.6 U11.5 28.09,168.25 29.75,169.9 29.81,169.9 30,169.9 U12.2
UNREG
  Top 0.406: J1.P$7 19.59,35.59 21,37 39,37 | 39,37 41,35 41,32 40,31 38.23,31 U$4.1 | 39,37 43.43,37 44.93,38.51 76.49,38.51 90,25 90,20.09 J2.3
UNREG1
  Top 0.406: J3.P$7 19.59,65.59 21,67 39,67 | 39,67 41,65 41,62 40,61 38.23,61 U$1.1 | 39,67 43.43,67 44.93,68.51 76.49,68.51 90,55 90,50.09 J4.3
UNREG2
  Top 0.406: J5.P$7 19.59,95.59 21,97 39,97 | 39,97 41,95 41,92 40,91 38.23,91 U$2.1 | 39,97 43.43,97 44.93,98.51 76.49,98.51 90,85 90,80.09 J6.3
UNREG3
  Top 0.406: J7.P$7 19.59,125.59 21,127 39,127 | 39,127 41,125 41,122 40,121 38.23,121 U$3.1 | 39,127 43.43,127 44.93,128.51 76.49,128.51 90,115 90,110.09 J8.3
UNREG4
  Top 0.406: J9.P$7 19.59,155.59 21,157 39,157 | 39,157 41,155 41,152 40,151 38.23,151 U$5.1 | 39,157 43.43,157 44.93,158.51 76.49,158.51 90,145 90,140.09 J10.3
UNREG5
  Top 0.406: J11.P$7 19.59,185.59 21,187 39,187 | 39,187 41,185 41,182 40,181 38.23,181 U$6.1 | 39,187 43.43,187 44.93,188.51 76.49,188.51 90,175 90,170.09 J12.3